# Altium PCB PCB1.PcbDoc
Units mil, origin at the board's own origin, x right, y up, seen from the top; angles counter-clockwise.
Board outline 6000 x 4000 mil, 2 copper layers (Top Layer, Bottom Layer); 8 components, 6 nets, 27 pads, 0 vias.
Unrouted connection lines stored in the file: 20.
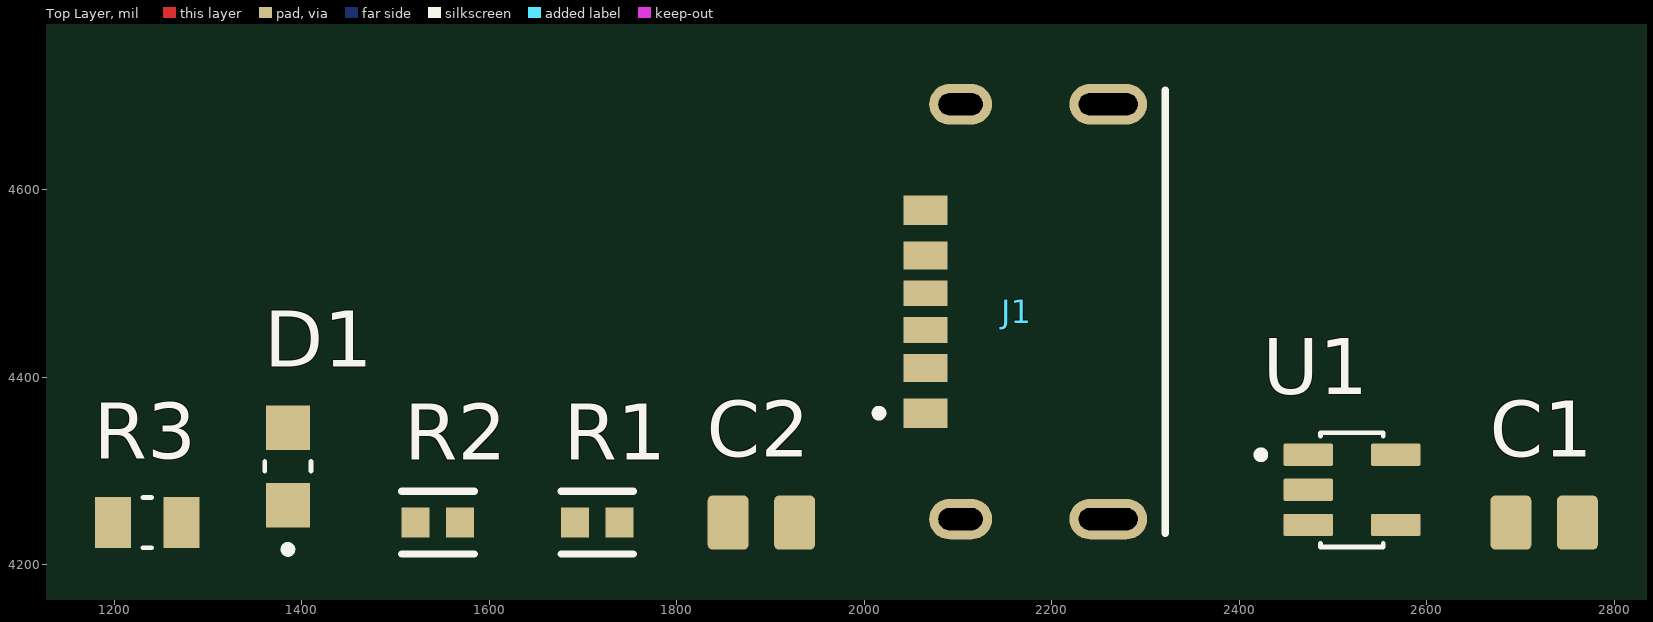
[diagram p0: Top Layer view]
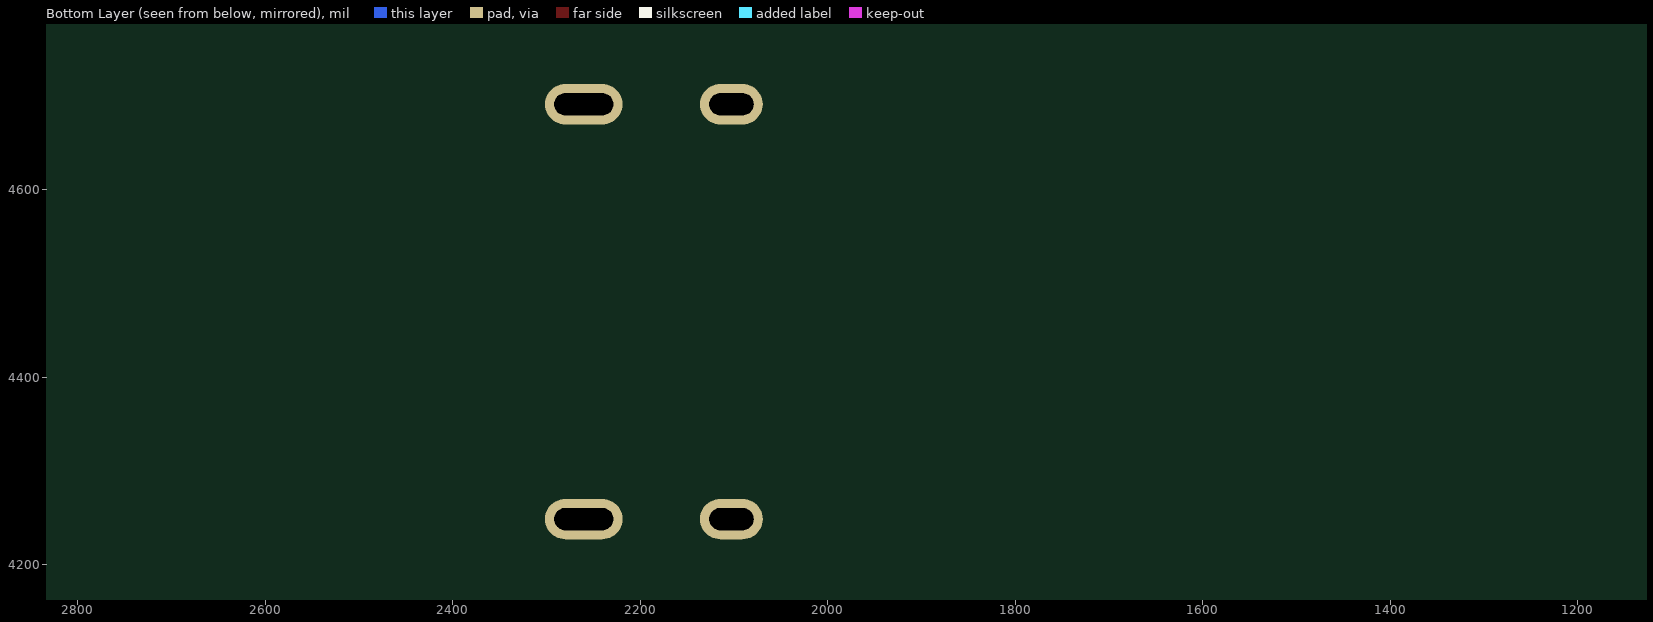
[diagram p1: Bottom Layer view, seen from below]

## Layer stack, top to bottom
Top Solder: solder mask 0.4, Solder Resist, Dk 3.5
Top Layer: signal copper 1.4
Dielectric 1: dielectric 12.6, FR-4, Dk 4.8
Bottom Layer: signal copper 1.4
Bottom Solder: solder mask 0.4, Solder Resist, Dk 3.5

## Board outline
1000,1000 7000,1000 7000,5000 1000,5000

## Design rules (kind name [scope] priority, off if disabled: settings)
Clearance [All] p1: gap=10 ignorepadtopadclearanceinfootprint=FALSE
PolygonConnect [All] p1: connectstyle=Relief reliefconductorwidth=10 reliefentries=4 polygonreliefangle="90 Angle" airgapwidth=10
RoutingVias [All] p1: holewidth=28 width=50 viastyle="Through Hole" minholewidth=28 minwidth=50 maxholewidth=28 maxwidth=50
SolderMaskExpansion [All] p1: expansion=4 istentingtop=FALSE
SupplyNets "Schematic Supply Nets_3" [InNet('GND')] p1: voltage=0.000
SupplyNets "Schematic Supply Nets_2" [InNet('+3.3V')] p2: voltage=0.000
SupplyNets "Schematic Supply Nets_1" [InNet('+5')] p3: voltage=0.000
SupplyNets "Schematic Supply Nets" [InNet('+5V')] p4: voltage=0.000
Width [All] p1: maxlimit=10 minlimit=10 preferedwidth=10
30 further rules are at their usual default settings.

## Components (designator, comment, footprint, x,y, rotation, side; value= is the part's Value field where it differs from the comment)
C1 "10uF" CAPC2012X145N 2725,4245 r0 top
C2 "10uF" CAPC2012X145N 1890,4245 r0 top
D1 "HSMM-C170" LED_HSMM-C170 1385,4305 r90 top
J1 "USB4515-GF-A_REVA" GCT_USB4515-GF-A_REVA 2260,4470 r90 top
R1 "5.1k" FP-CPF0603-IPC_C 1715,4245 r0 top value=51.1KΩ
R2 "5.1k" FP-CPF0603-IPC_C 1545,4245 r0 top value=51.1KΩ
R3 "1k" RESC2012X60N 1235,4245 r0 top
U1 "AP2112K-3.3TRG1" SOT95P285X140-5N 2520,4280 r0 top

## Footprints (in the part's own frame and the unit in brackets; to place one, negate y for a bottom-side part, rotate by r counter-clockwise, add the part's x,y. Pads: shape width x height; smd on the part's side, far side on the other; paste and mask are expansions set on the pad)
CAPC2012X145N [mm]
  rrect25% 1.11x1.47 smd: 1(-0.9,0) 2(0.9,0)
  body extent -1,-0.63 1,0.63, height 1.45
FP-CPF0603-IPC_C [mil]
  rect 29.85x31.97 smd paste+0 mask+0: 1(-23.7,0) 2(23.7,0)
  silkscreen extent -39,-33 39,33, body extent -43,-22 43,22, height 10
GCT_USB4515-GF-A_REVA [mm]
  rect 0.7x1.2 smd: A5(-0.5,4.95) B5(0.5,4.95)
  rect 0.76x1.2 smd: A9(1.52,4.95) B9(-1.52,4.95)
  rect 0.8x1.2 smd: A12(2.75,4.95) B12(-2.75,4.95)
  oval 1.1x2.1 hole 0.6 slot 1.6 at 90 deg: S1(-5.62,0) S2(5.62,0)
  oval 1.1x1.7 hole 0.6 slot 1.2 at 90 deg: S3(-5.62,4) S4(5.62,4)
  silkscreen extent -6,-1.55 6,6.31, body extent -5.77,-2.4 5.77,5.1, height 1.56
LED_HSMM-C170 [mm]
  rect 1.2x1.2 smd: A(1.05,0) C(-1.05,0)
  silkscreen extent -2.35,-0.63 0.13,0.63, body extent -1,-0.63 1,0.63, height 0.8
RESC2012X60N [mm]
  rect 0.97x1.38 smd: 1(-0.93,0) 2(0.93,0)
  silkscreen extent -0.12,-0.68 0.12,0.68, body extent -1,-0.63 1,0.63, height 0.6
SOT95P285X140-5N [mm]
  rrect15% 1.35x0.6 smd: 1(-1.185,0.95) 2(-1.185,0) 3(-1.185,-0.95) 4(1.185,-0.95) 5(1.185,0.95)
  silkscreen extent -2.57,-1.55 0.85,1.55, body extent -1.5,-1.4 1.5,1.4, height 1.4

## Part data
C1 C2: library part CL21A106KAYNNNE, "10 ÂµF Â±10% 25V Ceramic Capacitor X5R 0805 (2012 Metric)", Package="SMD-2 Samsung", Check_prices=https://www.snapeda.com/parts/CL21A106KAYNNNE/Samsung/view-part/?ref=eda, MF=Samsung, MP=CL21A106KAYNNNE, SnapEDA_Link=https://www.snapeda.com/parts/CL21A106KAYNNNE/Samsung/view-part/?ref=snap
D1: Package=None, Availability=Unavailable, MP=HSMM-C170, Price=None
J1: "Type C USB Charging Connector", Package=None, Check_prices=https://www.snapeda.com/parts/USB4515-GF-A/Global+Connector+Technology/view-part/?ref=eda, Digi-Key_Part_Number=2073-USB4515-GF-ATR-ND, MF="Global Connector Technology", MP=USB4515-GF-A, SnapEDA_Link=https://www.snapeda.com/parts/USB4515-GF-A/Global+Connector+Technology/view-part/?ref=snap
R1 R2: library part CMP-03211-009648-1, "RES SMD 51.1KΩ 0.1% 1/16W 0603", Manufacturer="TE Connectivity", Manufacturer Part Number=CPF0603B51K1E, Package=CPF0603, Power Rating=0.063W, Resistance=51.1KΩ, Temperature="-55°C to +155°C", Temperature Coefficient=25ppm/°C, Temperature Range High=+155°C, Temperature Range Low=-55°C, Tolerance=0.1%, Voltage Rating=50V, Automotive=No, Category=Res, ComponentLink2Description=Datasheet, ComponentLink2URL=https://www.te.com/commerce/DocumentDelivery/DDEController?Action=showdoc&DocId=Data+Sheet%7F1773200%7FM%7Fpdf%7FEnglish%7FENG_DS_1773200_M.pdf%7F3-1676481-2, Composition="Thin Film", Device Class L1="Passive Components", Device Class L2=Resistors, Device Class L3="Chip SMD Resistors", Height=0.55mm, Ipc Land Pattern Name=RESC15580X45, Lead Free=Yes, Octopart=https://octopart.com/cpf0603b51k1e-te+connectivity-22739314, octopart_url=https://octopart.com/cpf0603b51k1e-te+connectivity-22739314, packaging="5k Reel", RoHS=TRUE, Series=CPF
R3: library part CRS0805-JX-102ELF, "1 kOhms Â±5% 0.25W, 1/4W Chip Resistor 0805 (2012 Metric) High Voltage, Pulse Withstanding Thick Film", Package="2012 Stackpole", Availability="In Stock", Check_prices=https://www.snapeda.com/parts/CRS0805-JX-102ELF/Bourns/view-part/?ref=eda, MF=Bourns, MP=CRS0805-JX-102ELF, Price=None, Purchase-URL=https://pricing.snapeda.com/search/part/CRS0805-JX-102ELF/?ref=eda, SnapEDA_Link=https://www.snapeda.com/parts/CRS0805-JX-102ELF/Bourns/view-part/?ref=snap
U1: "Linear Voltage Regulator IC Positive Fixed 1 Output 600mA SOT-25", Package="SOT-753 Diodes Inc.", Availability="In Stock", Check_prices=https://www.snapeda.com/parts/AP2112K-3.3TRG1/Diodes+Inc./view-part/?ref=eda, MF="Diodes Inc.", MP=AP2112K-3.3TRG1, Price=None, Purchase-URL=https://pricing.snapeda.com/search/part/AP2112K-3.3TRG1/?ref=eda, SnapEDA_Link=https://www.snapeda.com/parts/AP2112K-3.3TRG1/Diodes+Inc./view-part/?ref=snap

## Nets (pads, with @x,y where several pads share a name; then routed paths per layer and width w, separated by ;. In a path a pad name is that pad's centre, name@x,y a point inside that pad or via, vN(x,y) a via of type N, cw(c..) or ccw(c..) an arc to the next point about the centre after c; other vN are vias at no path point)
+3.3V: C2.1 R3.1 U1.5
+5V: C1.2 J1.A9 J1.B9 U1.1 U1.3
GND: C1.1 C2.2 D1.C J1.A12 J1.B12 J1.S1 J1.S2 J1.S3 J1.S4 R1.2 R2.2 U1.2
NetD1_A: D1.A R3.2
NetJ1_A5: J1.A5 R1.1
NetJ1_B5: J1.B5 R2.1
pads on no net: U1.4

## Text inside footprints (layer, text, board x,y; h text height)
J1: Mechanical 13 "PCB EDGE" at 2315.12,4731.42 h16 r90